# Altium PCB KRing_B1.PcbDoc
Units mm, origin at the board's own origin, x right, y up, seen from the top; angles counter-clockwise.
Board outline 37.8 x 37.8 mm, 2 copper layers (Top Layer, Bottom Layer), stack 0.471 mm thick; 74 components, 52 nets, 268 pads, 9 vias.
Unrouted connection lines stored in the file: 153.
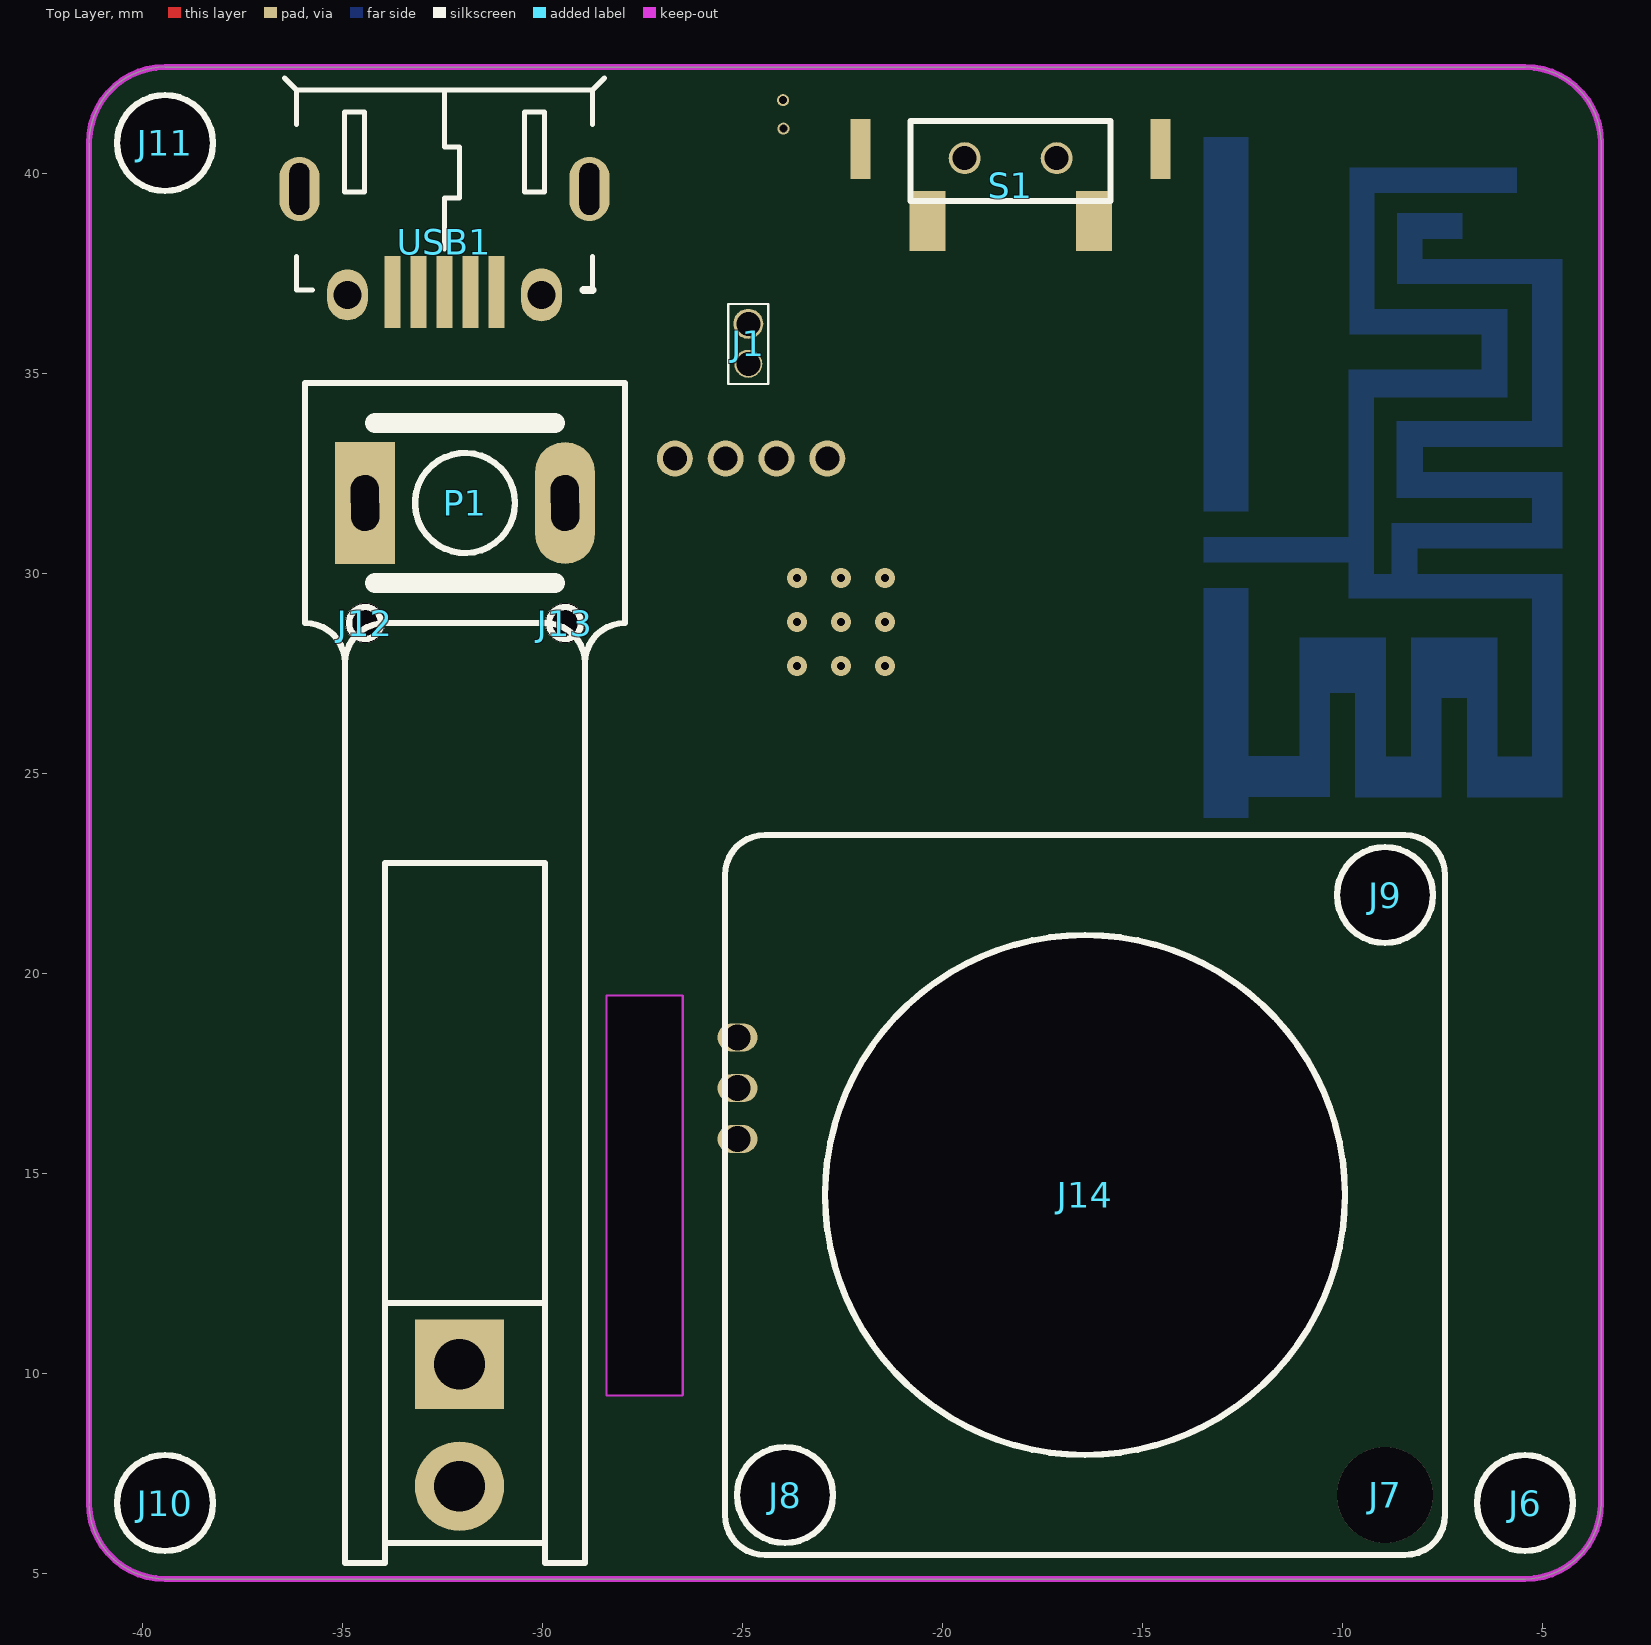
[diagram p0: Top Layer view]
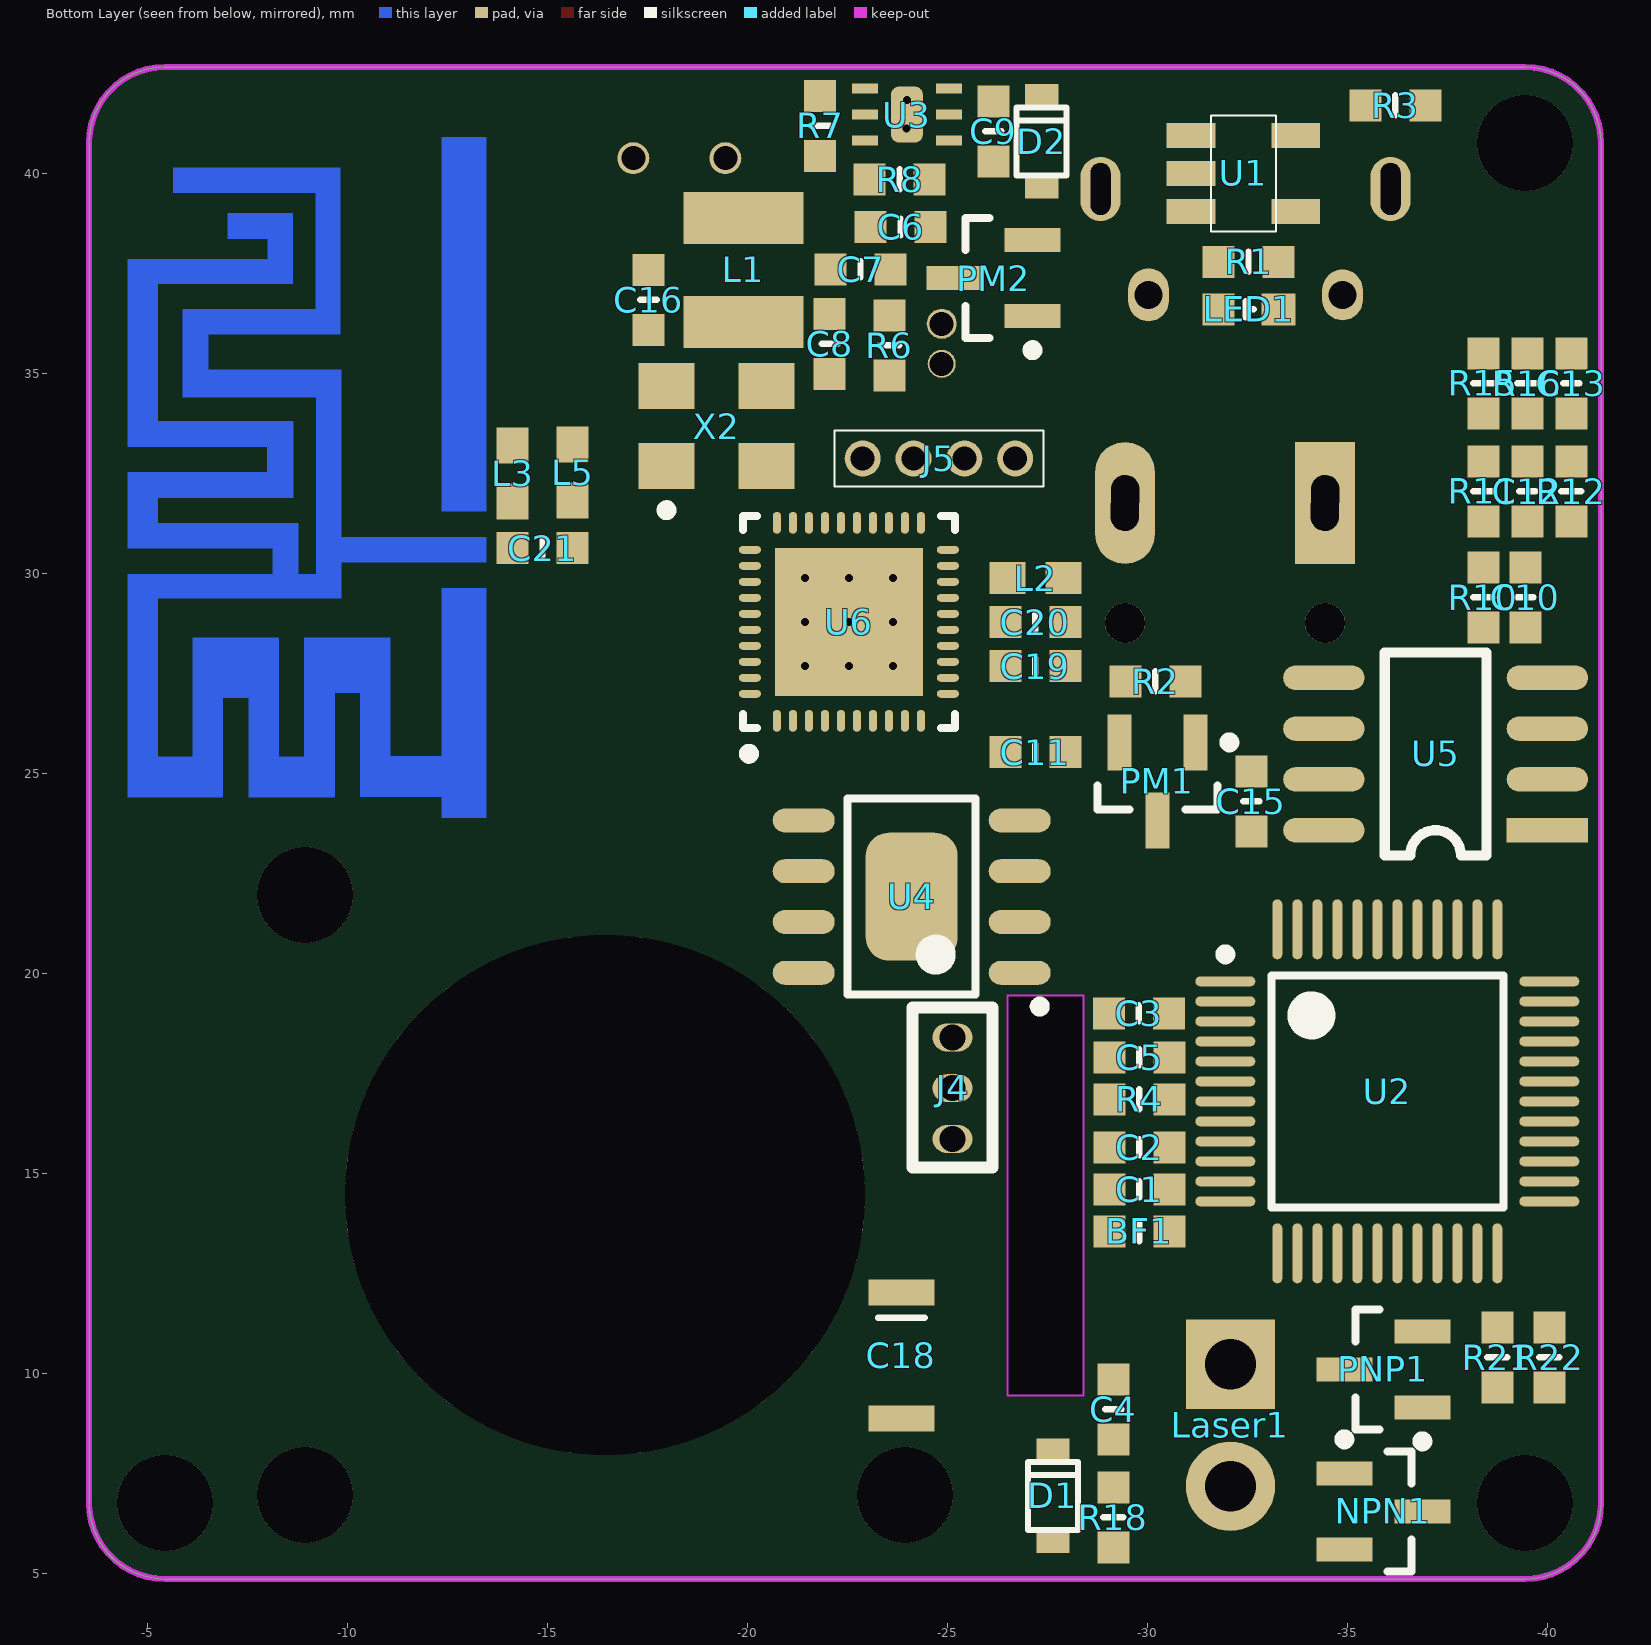
[diagram p1: Bottom Layer view, seen from below]

## Layer stack, top to bottom
Top Layer: signal copper 0.0356
Dielectric: core 0.4, FR-4, Dk 4.8
Bottom Layer: signal copper 0.0356

## Board outline
-41.341,6.759 ccw(c-39.441,6.759) -39.441,4.859 -5.441,4.859 ccw(c-5.441,6.759) -3.541,6.759 -3.541,40.759 ccw(c-5.441,40.759) -5.441,42.659 -39.441,42.659 ccw(c-39.441,40.759) -41.341,40.759
cut-out: -28.411,19.459 -26.481,19.459 -26.481,9.459 -28.411,9.459 -28.411,19.459

## Design rules (kind name [scope] priority, off if disabled: settings)
Clearance "6mil Special" [(HasFootprint('FPC 0.5mm 4P') OR HasFootprint('FPC 0.5mm 16P') OR HasFootprint('QFN40P500X500X90_HS-41L'))] p1: gap=0.152
Clearance "8mil all" [All] p2: gap=0.203
ComponentClearance [All] p1: gap=-100 collisioncheckmode=3 verticalgap=0.254 showdistances=FALSE
Height [All] p1: minheight=0 maxheight=50.8 prefheight=12.7
HoleSize [All] p1: absolutevalues=TRUE maxlimit=1817.048 minlimit=0 maxpercent=80.000 minpercent=20.000
HoleToHoleClearance [All] p1: gap=0.203 allowstackedmicrovias=TRUE
MinimumSolderMaskSliver [All] p1: minsoldermaskwidth=0
PolygonConnect PolygonConnect_1 [isvia] p1: connectstyle=Direct reliefconductorwidth=0.254 reliefentries=4 polygonreliefangle="90 Angle" airgapwidth=0.254
PolygonConnect [All] p2: connectstyle=Relief reliefconductorwidth=0.254 reliefentries=4 polygonreliefangle="90 Angle" airgapwidth=0.254
RoutingCorners [All] p1: cornerstyle=45-Degree minsetback=0.254 maxsetback=2.54
RoutingVias [All] p1: holewidth=0.356 width=0.508 viastyle="Through Hole" minholewidth=0.356 minwidth=0.508 maxholewidth=2.54 maxwidth=5.08
SilkToSilkClearance [All] p1: silktosilkclearance=0
SilkToSolderMaskClearance [IsPad] p1: minsilkscreentomaskgap=0 clearancetoexposedcopper=TRUE
SolderMaskExpansion [All] p1: expansion=0.102
Width 20mil_Power [(InNet('EP_SUPPLY&VBAT') OR InNet('PSUPPLY') OR InNet('P_3.3V') OR InNet('PSUPPLYBAT') OR InNet('P_3.3V') OR InNet('P_5V'))] p1: maxlimit=1000 minlimit=0.203 preferedwidth=0.508
Width 8mil_Basic [All] p2: maxlimit=100 minlimit=0.203 preferedwidth=0.254
20 further rules are at their usual default settings.

## Components (designator, comment, footprint, x,y, rotation, side; value= is the part's Value field where it differs from the comment)
BF1 "BF" R0603 -29.8,13.55 r0 bottom
C1 "1uf" C0603 -29.8,14.6 r180 bottom
C2 "0.1uf" C0603 -29.8,15.65 r180 bottom
C3 "1uf" C0603 -29.79,19 r180 bottom
C4 "1uf" C0603 -29.15,9.1 r270 bottom
C5 "1uf" C0603 -29.8,17.9 r180 bottom
C6 "22pf" C0603 -23.83,38.66 r0 bottom
C7 "10uf" C0603 -22.83,37.6 r180 bottom
C8 "1uf" C0603 -22.06,35.74 r270 bottom
C9 "10uf" C0603 -26.15,41.05 r90 bottom
C10 "6.8pF" C0603 -39.45,29.4 r270 bottom
C11 "10uf" C0603 -27.2,25.53 r0 bottom
C12 "240pF" C0603 -39.5,32.05 r90 bottom
C13 "0.15uf" C0603 -40.6,34.75 r270 bottom
C15 "1uf" C0603 -32.6,24.3 r90 bottom
C16 "10uf" C0603 -17.53,36.84 r270 bottom
C18 "10uf" PolarC1206 -23.85,10.45 r270 bottom
C19 "1uf" C0603 -27.2,27.68 r180 bottom
C20 "1uf" C0603 -27.2,28.78 r180 bottom
C21 "1uf" C0603 -14.88,30.63 r180 bottom
D1 "1N5817" SOD323(0805) -27.64,6.94 r90 bottom
D2 "1N5817" SOD323(0805) -27.36,40.8 r90 bottom
J1 "CON2" Battry_Connector -24.86,36.24 r270 top
J2 "CON4" "CON4 1MM" -47.09,20.985 r90 bottom
J3 "CON1" CON1 5.35,21.33 r180 bottom
J4 "CON3" "Motor Connector" -25.13,17.13 r270 bottom
J5 "CON4" "CON4 1MM" -24.79,32.87 r180 bottom
J6 "CON1" 2.4mm -5.441,6.759 r0 top locked
J7 "CON1" 2.4mm -8.941,6.959 r0 top locked
J8 "CON1" 2.4mm -23.941,6.959 r0 top locked
J9 "CON1" 2.4mm -8.941,21.959 r0 top locked
J10 "CON1" 2.4mm -39.441,6.759 r0 top locked
J11 "CON1" 2.4mm -39.441,40.759 r0 top locked
J12 "CON1" 0.5mm -34.441,28.759 r90 top locked
J13 "CON1" 0.5mm -29.441,28.759 r90 top locked
J14 "CON1" 6.5mm -16.441,14.459 r0 top
L1 "4.7uh" GDNR3012 -19.9,37.59 r180 bottom
L2 "2.2uh" L0603 -27.2,29.88 r180 bottom
L3 "NC" L0603 -14.13,32.5 r270 bottom
L4 "NC" L0603 1.96,8.61 r0 top
L5 "NC" L0603 -15.63,32.52 r270 bottom
Laser1 "Laser" Laser -32.078,10.228 r270 bottom
LED1 "White" LED0603 -32.53,36.6 r180 bottom
NPN1 "8050" SOT23-3 -35.9,6.55 r180 bottom
P1 "photodetector" BPW34 -31.941,31.759 r0 top locked
PM1 "Si2303" SOT23-3 -30.25,24.8 r270 bottom
PM2 "Si2303" SOT23-3 -26.155,37.38 r0 bottom
PNP1 "8550" SOT23-3 -35.9,10.1 r0 bottom
R1 "4.7K" R0603 -32.53,37.79 r180 bottom
R2 "100K" R0603 -30.2,27.3 r0 bottom
R3 "20K" R0603 -36.2,41.7 r0 bottom
R4 "0" R0603 -29.8,16.85 r180 bottom
R5 "1M" R0603 -50.22,27.54 r0 bottom
R6 "50R" R0603 -23.55,35.7 r90 bottom
R7 "120K" R0603 -21.82,41.19 r90 bottom
R8 "27K" R0603 -23.81,39.85 r180 bottom
R10 "10M" R0603 -38.4,29.4 r90 bottom
R11 "220K" R0603 -38.4,32.05 r270 bottom
R12 "3K" R0603 -40.6,32.05 r90 bottom
R15 "2M" R0603 -38.4,34.75 r270 bottom
R16 "510" R0603 -39.5,34.75 r90 bottom
R18 "10K" R0603 -29.15,6.4 r90 bottom
R21 "1K" R0603 -38.75,10.4 r90 bottom
R22 "1K" R0603 -40.05,10.4 r90 bottom
S1 "SW_Mini" SW_MINI -18.3,40.103 r180 top
U1 "LTC4054" LTC4054 -32.4,40 r270 bottom
U2 "STM32F103C8T6" TSQFP50P900X900X160-48L -36,17.05 r180 bottom
U3 "TPS62260" QFN2X2-6 -22.94,42.12 r180 bottom
U4 "W25X20CLSNIG" SOIC8 -24.11,21.92 r0 bottom
U5 "LMC6482" LMC6482 -40,23.58 r0 bottom
U6 "DA14580-01AT1" QFN40P500X500X90_HS-41L -22.54,28.79 r90 bottom
USB1 "MicroUSB" MICROUSB -32.455,38.286 r270 top locked
X2 "3225 16Mhz" 3225 -19.23,33.68 r90 bottom
Y1 "FC-135" FC-135 -1.41,7.26 r90 top

## Footprints (in the part's own frame and the unit in brackets; to place one, negate y for a bottom-side part, rotate by r counter-clockwise, add the part's x,y. Pads: shape width x height; smd on the part's side, far side on the other; paste and mask are expansions set on the pad)
0.5mm [mm]
  round 1 hole 1: 1(0,0)
2.4mm [mm]
  round 2.4 hole 2.4 unplated: 1(0,0)
6.5mm [mm]
  round 13 hole 13 unplated: ""(0,0)
3225 [mm]
  rect 1.15x1.4 smd: 1(-1,1.25) 2(-1,-1.25) 3(1,-1.25) 4(1,1.25)
  silkscreen extent -2.22,1.13 -1.98,1.38, body extent -1.25,-1.6 1.25,1.6, height 0.7
Battry_Connector [mm]
  round 0.75 hole 0.6: 1(0,0)
  round 0.7 hole 0.6: 2(1,0)
  silkscreen extent -0.5,-0.5 1.5,0.5
BPW34 [mm]
  rect 1.5x3.048 hole 0.7 slot 1.4 at 90.5 deg: A(-2.5,0)
  oval 1.5x3.048 hole 0.7 slot 1.4 at 90.5 deg: C(2.5,0)
  silkscreen extent -2.25,-2 2.25,2
C0603 [mm]
  rect 0.8x0.8 smd: 1(-0.75,0) 2(0.75,0)
  silkscreen extent 0,-0.2 0,0.2, body extent -0.8,-0.4 0.8,0.4, height 0.8
CON1 [mil]
  rect 60x70 hole 32: 1(0,0)
  silkscreen extent -50,-50 50,50, body extent -51,-50 52,50, height 295
"CON4 1MM" [mm]
  round 0.9 hole 0.6: 1(-1.905,0) 2(-0.635,0) 3(0.635,0) 4(1.905,0)
  silkscreen extent -2.62,-0.7 2.62,0.7
FC-135 [mm]
  rect 1x1.5 smd: 1(-1.25,0) 2(1.25,0)
  silkscreen extent -1.6,-0.75 1.6,0.75, body extent -1.6,-0.75 1.6,0.75, height 0.8
GDNR3012 [mm]
  rect 3x1.3 smd: 1(0,1.3) 2(0,-1.3)
  body extent -1.5,-1.5 1.5,1.5, height 1.2
L0603 [mm]
  rect 0.9x0.8 smd: 1(-0.7,0) 2(0.7,0)
  body extent -0.8,-0.4 0.8,0.4, height 0.8
Laser [mil]
  rect 88x88 hole 50: 1(0,0)
  round 88 hole 50: 2(120,0)
LED0603 [mm]
  rect 0.8x0.8 smd: A(-0.75,0)
  rect 0.85x0.8 smd: C(0.75,0)
  silkscreen extent -0.07,-0.2 0.13,0.2, body extent -0.8,-0.4 0.8,0.4, height 0.8
LMC6482 [mil]
  rect 80x24 smd: 1(0,0)
  oval 80x24 smd: 2(0,-50) 3(0,-100) 4(0,-150) 5(220,-150) 6(220,-100) 7(220,-50) 8(220,0)
  silkscreen extent 60,-175 160,25, body extent 24,-176 196,27, height 43
LTC4054 [mm]
  rect 0.62x1.22 smd: 1(-0.95,-1.31) 2(0,-1.31) 3(0.95,-1.31) 4(0.95,1.31) 5(-0.95,1.31)
  silkscreen extent -1.45,-0.81 1.45,0.81, body extent -1.45,-0.82 1.45,0.81, height 1
MICROUSB [mm]
  oval 1.6x1 hole 0.5 slot 1.3 at 0 deg unplated: 0(-1.325,3.625) 0(-1.325,-3.625)
  rect 1.8x0.4 smd: 1(1.25,1.3) 2(1.25,0.65) 3(1.25,0) 4(1.25,-0.65) 5(1.25,-1.3)
  oval 1.321x1.016 hole 0.7 unplated: ""(1.325,2.425)
  oval 1.27x1.016 hole 0.7 unplated: ""(1.325,-2.425)
  silkscreen extent -4.1,-4 1.2,4, body extent -3.62,-3.96 1.81,4.02, height 2.99
"Motor Connector" [mm]
  oval 0.7x1 hole 0.65: 1(-1.27,0) 2(0,0) 3(1.27,0)
  silkscreen extent -2.02,-1 1.98,1
PolarC1206 [mm]
  rect 0.65x1.65 smd: A(-1.575,0) C(1.575,0)
  silkscreen extent -0.94,-0.58 -0.94,0.58, body extent -1.6,-0.8 1.6,0.8, height 0.6
QFN2X2-6 [mm]
  rect 0.65x0.25 smd: 1(0,0) 2(0,-0.65) 3(0,-1.3) 4(2.1,-1.3) 5(2.1,-0.65) 6(2.1,0)
  round 0.3 hole 0.2: 7(1.04,-1) 7(1.05,-0.29)
  rrect50% 0.8x1.4 smd: 7(1.05,-0.65)
  body extent 0.22,-1.59 1.86,0.29, height 0.8
QFN40P500X500X90_HS-41L [mm] "QFN, 40-Leads, Body 5.00x5.00mm, Pitch 0.40mm, Thermal Pad 3.70x3.70mm, IPC High Density"
  oval 0.55x0.2 smd: 1(-2.475,1.8) 2(-2.475,1.4) 3(-2.475,1) 4(-2.475,0.6) 5(-2.475,0.2) 6(-2.475,-0.2) 7(-2.475,-0.6) 8(-2.475,-1) 9(-2.475,-1.4) 10(-2.475,-1.8) 21(2.475,-1.8) 22(2.475,-1.4) 23(2.475,-1) 24(2.475,-0.6) 25(2.475,-0.2) 26(2.475,0.2) 27(2.475,0.6) 28(2.475,1) 29(2.475,1.4) 30(2.475,1.8)
  oval 0.2x0.55 smd: 11(-1.8,-2.475) 12(-1.4,-2.475) 13(-1,-2.475) 14(-0.6,-2.475) 15(-0.2,-2.475) 16(0.2,-2.475) 17(0.6,-2.475) 18(1,-2.475) 19(1.4,-2.475) 20(1.8,-2.475) 31(1.8,2.475) 32(1.4,2.475) 33(1,2.475) 34(0.6,2.475) 35(0.2,2.475) 36(-0.2,2.475) 37(-0.6,2.475) 38(-1,2.475) 39(-1.4,2.475) 40(-1.8,2.475)
  rect 3.7x3.7 smd: 41(0,0)
  silkscreen extent -3.42,-2.65 2.65,2.65, body extent -2.5,-2.5 2.5,2.5, height 0.9
R0603 [mm]
  rect 0.8x0.8 smd: 1(-0.75,0) 2(0.75,0)
  silkscreen extent 0,-0.25 0,0.25, body extent -0.8,-0.4 0.8,0.4, height 0.5
SOD323(0805) [mm]
  rect 0.63x0.83 smd: A(-1.115,0) C(1.115,0)
  silkscreen extent -0.85,-0.63 0.85,0.63, body extent -0.85,-0.63 0.86,0.63, height 1.1
SOIC8 [mm]
  oval 1.55x0.6 smd: 1(-2.7,1.905) 2(-2.7,0.635) 3(-2.7,-0.635) 4(-2.7,-1.905) 5(2.7,-1.905) 6(2.7,-0.635) 7(2.7,0.635) 8(2.7,1.905)
  rrect50% 2.3x3.2 smd: 9(0,0)
  silkscreen extent -3.32,-2.45 1.6,2.87, body extent -1.65,-2.41 1.65,2.41, height 1.35
SOT23-3 [mm]
  rect 1.4x0.6 smd: 1(-0.975,0.95) 2(-0.975,-0.95) 3(0.975,0)
  silkscreen extent -1.1,-1.5 0.7,1.92, body extent -0.7,-1.5 0.7,1.5, height 1
SW_MINI [mm]
  rect 0.9x1.5 smd: 1(2.08,1.3) 2(-2.08,1.3)
  rect 0.5x1.5 smd: ""(-3.75,-0.5) ""(3.75,-0.5)
  round 0.8 hole 0.6: ""(-1.15,-0.277) ""(1.15,-0.277)
  silkscreen extent -2.5,-1.2 2.5,0.8, body extent -3.76,-2.28 3.74,1.72, height 3.4
TSQFP50P900X900X160-48L [mm] "TSQFP, 48-Leads, Body 7.00x7.00mm, Pitch 0.50mm, IPC High Density"
  oval 1.5x0.25 smd: 1(-4.05,2.75) 2(-4.05,2.25) 3(-4.05,1.75) 4(-4.05,1.25) 5(-4.05,0.75) 6(-4.05,0.25) 7(-4.05,-0.25) 8(-4.05,-0.75) 9(-4.05,-1.25) 10(-4.05,-1.75) 11(-4.05,-2.25) 12(-4.05,-2.75) 25(4.05,-2.75) 26(4.05,-2.25) 27(4.05,-1.75) 28(4.05,-1.25) 29(4.05,-0.75) 30(4.05,-0.25) 31(4.05,0.25) 32(4.05,0.75) 33(4.05,1.25) 34(4.05,1.75) 35(4.05,2.25) 36(4.05,2.75)
  oval 0.25x1.5 smd: 13(-2.75,-4.05) 14(-2.25,-4.05) 15(-1.75,-4.05) 16(-1.25,-4.05) 17(-0.75,-4.05) 18(-0.25,-4.05) 19(0.25,-4.05) 20(0.75,-4.05) 21(1.25,-4.05) 22(1.75,-4.05) 23(2.25,-4.05) 24(2.75,-4.05) 37(2.75,4.05) 38(2.25,4.05) 39(1.75,4.05) 40(1.25,4.05) 41(0.75,4.05) 42(0.25,4.05) 43(-0.25,4.05) 44(-0.75,4.05) 45(-1.25,4.05) 46(-1.75,4.05) 47(-2.25,4.05) 48(-2.75,4.05)
  silkscreen extent -4.18,-2.9 2.9,3.55, body extent -3.5,-3.5 3.5,3.5, height 1.6

## Part data
BF1: "磁珠"
C1 C2 C3 C4 C5 C6 C7 C8 C9 C10 C11 C12 C13 C15 C16 C19 C20 C21: library part C
C18: library part PolarCap
D1 D2: library part Diode
L1 L2 L3 L4 L5: library part L
LED1: library part LED
NPN1: library part NPN
PM1 PM2: library part PMOS
PNP1: library part PNP
R1 R2 R3 R4 R5 R6 R7 R8 R10 R11 R12 R15 R16 R18 R21 R22: library part R

## Via types
v1: diameter 0.5, hole 0.2, Top Layer to Bottom Layer, 9 vias

## Nets (pads, with @x,y where several pads share a name; then routed paths per layer and width w, separated by ;. In a path a pad name is that pad's centre, name@x,y a point inside that pad or via, vN(x,y) a via of type N, cw(c..) or ccw(c..) an arc to the next point about the centre after c; other vN are vias at no path point)
AGND: C1.1 C2.1 R4.2 U2.8
C_LASER: R21.2 U2.21
C_MOTOR: R22.2 U2.22
CHARGE_STATES: U1.1 U6.27
DA_RXD: U2.30 U6.3
DA_TXD: U2.31 U6.2
DEBUG_LED: U6.22
DEBUG_LED2: U6.24
EVCC: R1.2 U1.4 USB1.1
F_CLK: U4.6 U6.1
F_CS: U4.1 U6.4
F_MISO: U4.2 U6.7
F_MOSI: U4.5 U6.9
GND: C3.1 C4.1 C5.1 C7.1 C8.1 C9.2 C11.1 C15.2 C16.1 C18.C C19.2 C20.2 J1.2 J2.2 J5.2 L3.1 L4.1 L5.1 Laser1.2 LED1.C NPN1.2 R3.1 R4.1 R5.2 R8.2 R12.1 R16.1 S1.1 U1.2 U2.23 U2.35 U2.47 U3.2 U3.6 U3.7 U4.4 U5.4 U6.5 U6.16 U6.23 U6.34 USB1.5 X2.2 X2.4
LASER_STATE: PM1.1 R2.1 U6.20
M_SIG: J4.3 R18.1 U2.11 U2.12
NetC5_2: C5.2 U2.7
NetC6_1: C6.1 C7.2 L1.2 R6.2 R7.2
NetC6_2: C6.2 R7.1 R8.1 U3.3
NetC9_1: C9.1 D2.C PM2.2 U3.4 U3.5
NetC10_2: C10.2 P1.C R10.1 U5.2
NetC12_2: C12.2 R11.1 R12.2 U5.6
NetC13_1: C13.1 R15.1 R16.2 U5.5
NetC19_1: C19.1 C20.1 L2.2 U6.19 U6.31
NetC21_1: C21.1 L3.2 L4.2 U6.35
NetC21_2: C21.2 L5.2
NetD1_A: D1.A J4.1 NPN1.3
NetD2_A: D2.A PM2.1 R5.1
NetJ3_1: J3.1 U6.38
NetL1_1: L1.1 U3.1
NetL2_1: L2.1 U6.21
NetLaser1_1: Laser1.1 PNP1.3
NetLED1_A: LED1.A R1.1
NetNPN1_1: NPN1.1 R22.1
NetPNP1_1: PNP1.1 R21.1
NetR3_2: R3.2 U1.5
NetU6_11: U6.11 Y1.2
NetU6_12: U6.12 Y1.1
NetU6_29: U6.29 X2.1
NetU6_30: U6.30 X2.3
NSWCLK: J2.1 U2.37
NSWDIO: J2.3 U2.34
OUT1: C10.1 C13.2 R10.2 U2.14 U5.1
OUT2: C12.1 R11.2 U2.13 U5.7
P_3.3V: C8.2 C11.2 J5.4 PM1.2 R2.2 R6.1 U4.3 U4.7 U4.8 U6.14 U6.15
P_C3.3V: BF1.2 C3.2 C4.2 C15.1 C18.A D1.C J2.4 J4.2 PM1.3 PNP1.2 R15.2 R18.2 U2.1 U2.24 U2.36 U2.48 U5.8
SW_WAKEUP: C16.2 S1.2 U6.28
SWCLK: J5.1 U6.26
SWDIO: J5.3 U6.25
V0.58: P1.A U5.3
VBAT: J1.1 PM2.3 U1.3
VDDA: BF1.1 C1.2 C2.2 U2.9
pads on no net: J6.1 J7.1 J8.1 J9.1 J10.1 J11.1 J12.1 J13.1 J14. S1. U2.2 U2.3 U2.4 U2.5 U2.6 U2.10 U2.15 U2.16 U2.17 U2.18 U2.19 U2.20 U2.25 U2.26 U2.27 U2.28 U2.29 U2.32 U2.33 U2.38 U2.39 U2.40 U2.41 U2.42 U2.43 U2.44 U2.45 U2.46 U4.9 U6.6 U6.8 U6.10 U6.13 U6.17 U6.18 U6.32 U6.33 U6.36 U6.37 U6.39 U6.40 U6.41 USB1. USB1.0 USB1.2 USB1.3 USB1.4
copper on no net:
  other v1: -23.64,27.69 -22.54,27.69 -21.44,27.69 -23.64,28.79 -22.54,28.79 -21.44,28.79 -23.64,29.89 -22.54,29.89 -21.44,29.89

## Polygon pours and split planes (outlines as drawn)
GND on Bottom Layer "Bottom Layer-No Net" (solid, remove dead copper, pour order 2): -55.526,35.498 -102.026,35.498 -102.126,35.598 -102.126,-7.302 -102.226,-7.402 -55.876,-7.402 -55.476,-7.802
GND on Top Layer "Top Layer-No Net" (solid, remove dead copper, pour order 4): -57.53,28.085 -102.88,28.085 -102.88,-18.265 -58.03,-18.265 -57.53,-17.765

## Keep-outs
Keep-Out Layer:
  lines w0.051: -28.4,9.45 -28.4,19.45 -26.5,19.45 -26.5,9.45 -28.4,9.45
  lines w0.16: -41.341,6.759 ccw(c-39.441,6.759) -39.441,4.859 -5.441,4.859 ccw(c-5.441,6.759) -3.541,6.759 -3.541,40.759 ccw(c-5.441,40.759) -5.441,42.659 -39.441,42.659 ccw(c-39.441,40.759) -41.341,40.759 -41.341,6.759

## Other copper
Bottom Layer:
  rectangle: -13.481,31.547 -12.351,40.906
  region: -9.664,40.152 -9.664,39.504 -5.637,39.504 -5.637,40.152
  rectangle: -9.831,36.346 -9.202,40.152
  rectangle: -9.832,35.971 -5.875,36.612
  rectangle: -6.527,34.4 -5.875,36.612
  rectangle: -9.853,34.4 -5.875,35.095
  region: -8.64,39.005 -8.64,38.365 -7.005,38.365 -7.005,39.005
  rectangle: -8.64,37.233 -7.998,39.005
  rectangle: -8.64,37.233 -4.51,37.864
  rectangle net NetC21_1: -13.479,30.274 -9.493,30.912
  region: -5.271,37.864 -5.271,33.16 -4.51,33.16 -4.51,37.864
  rectangle: -8.648,33.16 -4.51,33.806
  rectangle: -8.648,31.89 -7.993,33.805
  rectangle: -8.647,31.89 -4.506,32.531
  rectangle: -5.272,30.621 -4.506,32.529
  rectangle: -8.78,30.619 -4.504,31.263
  rectangle: -8.78,29.375 -8.129,31.263
  rectangle: -9.853,29.375 -9.222,35.095
  rectangle: -9.853,29.375 -4.661,29.985
  rectangle: -6.76,24.398 -4.593,25.421
  rectangle: -5.27,24.399 -4.504,29.985
  rectangle: -6.89,24.398 -6.13,26.89
  rectangle: -8.297,26.879 -6.13,28.398
  rectangle: -8.297,25.114 -7.527,27.738
  rectangle: -8.975,24.399 -7.527,25.419
  rectangle: -9.69,24.398 -8.92,27.022
  rectangle: -10.461,27.008 -8.92,28.398
  rectangle: -11.08,25.406 -10.32,28.398
  rectangle: -12.363,24.408 -10.32,25.428
  rectangle: -13.48,23.888 -12.35,29.638

## Silkscreen, mask and mechanical layers (free items; w line width, h text height)
Top Overlay:
  circle w0.16: c-39.441,40.759 r1.2
  circle w0.16: c-29.441,28.759 r0.4
  circle w0.16: c-39.441,6.759 r1.2
  circle w0.16: c-16.441,14.459 r6.5
  circle w0.16: c-23.941,6.959 r1.2
  circle w0.16: c-34.441,28.759 r0.4
  circle w0.16: c-5.441,6.759 r1.2
  circle w0.16: c-8.941,21.959 r1.2
  circle w0.16: c-31.941,31.759 r1.25
  lines w0.16: -33.941,5.759 -29.941,5.759 ; -33.941,11.759 -33.878,11.759 -30.005,11.759 -29.941,11.759 ; -34.941,27.759 ccw(c-35.941,27.759) -35.941,28.759 -35.941,34.759 -27.941,34.759 -27.941,28.759 ccw(c-27.941,27.759) -28.941,27.759 ; -34.941,27.759 cw(c-33.941,27.759) -33.941,28.759 -29.941,28.759 cw(c-29.941,27.759) -28.941,27.759 ; -34.941,27.759 -34.941,5.259 -33.941,5.259 -33.941,22.759 -29.941,22.759 -29.941,5.259 -28.941,5.259 -28.941,27.759 ; -25.441,6.459 ccw(c-24.441,6.459) -24.441,5.459 -8.441,5.459 ccw(c-8.441,6.459) -7.441,6.459 -7.441,22.459 ccw(c-8.441,22.459) -8.441,23.459 -24.441,23.459 ccw(c-24.441,22.459) -25.441,22.459 -25.441,6.459
Mechanical 3:
  lines w0.16: -13.506,23.827 -12.306,23.827 -12.306,40.927 -13.506,40.927 -13.506,23.827
Mechanical 4:
  lines w0.16: -13.506,23.827 -4.106,23.827 -4.106,40.927 -13.506,40.927 -13.506,23.827
Mechanical 5:
  lines w0.1: -13.106,28.827 ccw(c-13.106,29.027) -13.106,29.227 ccw(c-13.106,29.027) -13.106,28.827 ; -13.106,33.127 ccw(c-13.106,33.327) -13.106,33.527 ccw(c-13.106,33.327) -13.106,33.127 ; -13.106,35.927 ccw(c-13.106,36.127) -13.106,36.327 ccw(c-13.106,36.127) -13.106,35.927 ; -13.006,23.927 ccw(c-13.006,24.127) -13.006,24.327 ccw(c-13.006,24.127) -13.006,23.927 ; -13.006,26.827 ccw(c-13.006,27.027) -13.006,27.227 ccw(c-13.006,27.027) -13.006,26.827 ; -13.006,38.827 ccw(c-13.006,39.027) -13.006,39.227 ccw(c-13.006,39.027) -13.006,38.827 ; -12.906,37.227 ccw(c-12.906,37.427) -12.906,37.627 ccw(c-12.906,37.427) -12.906,37.227 ; -12.806,25.827 ccw(c-12.806,26.027) -12.806,26.227 ccw(c-12.806,26.027) -12.806,25.827 ; -12.806,27.927 ccw(c-12.806,28.127) -12.806,28.327 ccw(c-12.806,28.127) -12.806,27.927 ; -12.806,32.027 ccw(c-12.806,32.227) -12.806,32.427 ccw(c-12.806,32.227) -12.806,32.027 ; -12.806,34.527 ccw(c-12.806,34.727) -12.806,34.927 ccw(c-12.806,34.727) -12.806,34.527 ; -12.806,40.027 ccw(c-12.806,40.227) -12.806,40.427 ccw(c-12.806,40.227) -12.806,40.027

## Dimensions
-39.441,42.659 to -39.441,4.859 on Top Overlay
-3.541,40.759 to -41.341,40.759 on Top Overlay

## Text inside footprints (layer, text, board x,y; h text height)
U4: Mechanical 15 "1" at -23.66,22.084 h0.75 r90